# EAGLE board board (EAGLE 9.5.0)
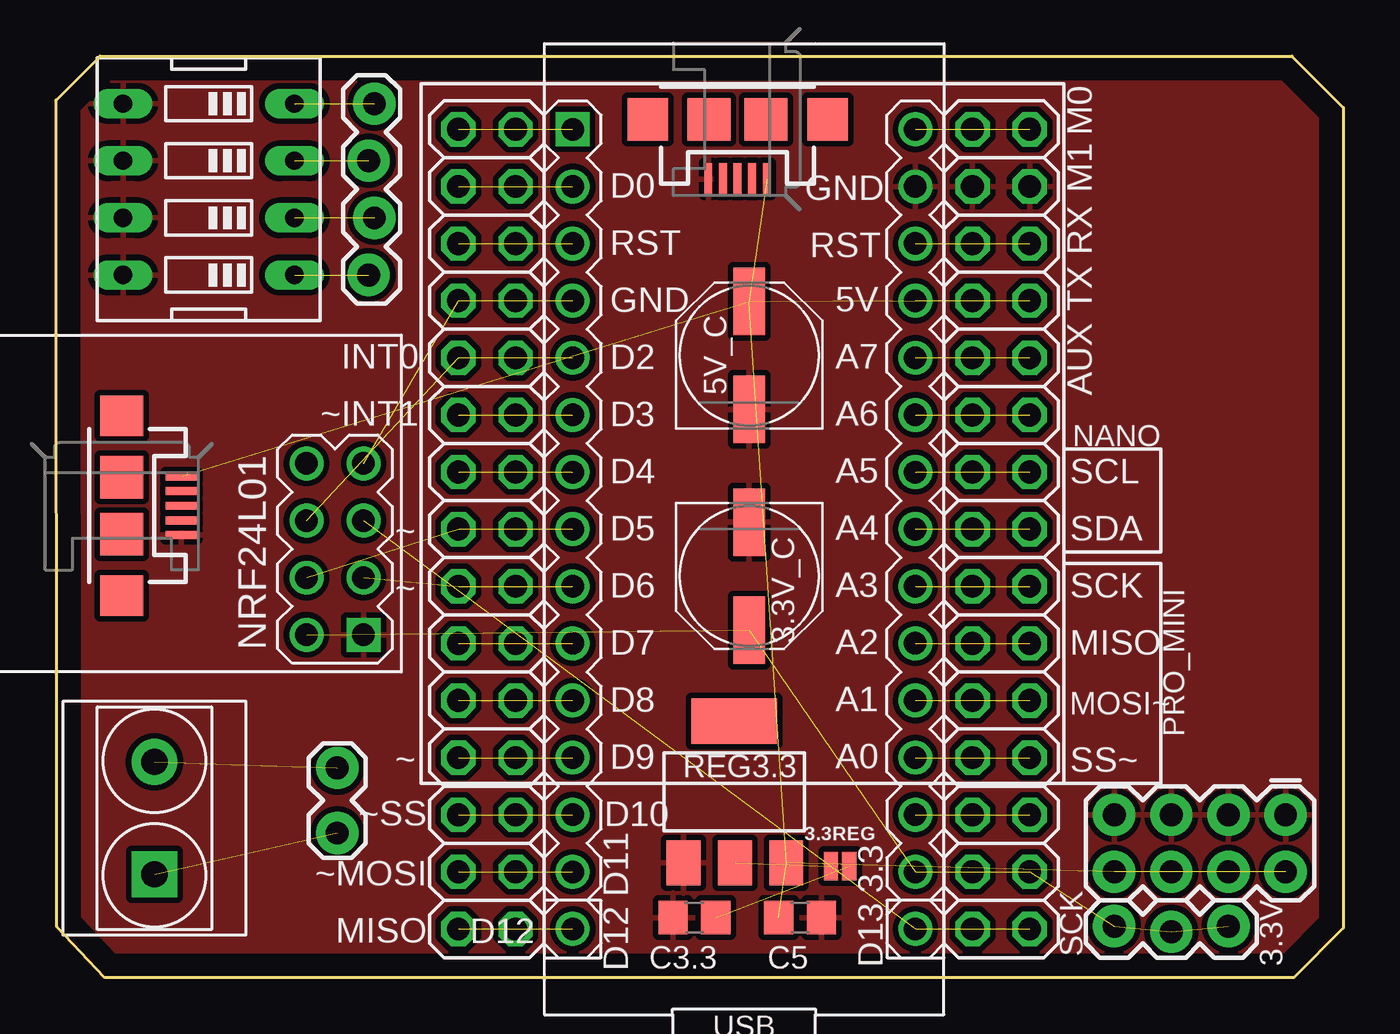
[diagram p0: board, top side]
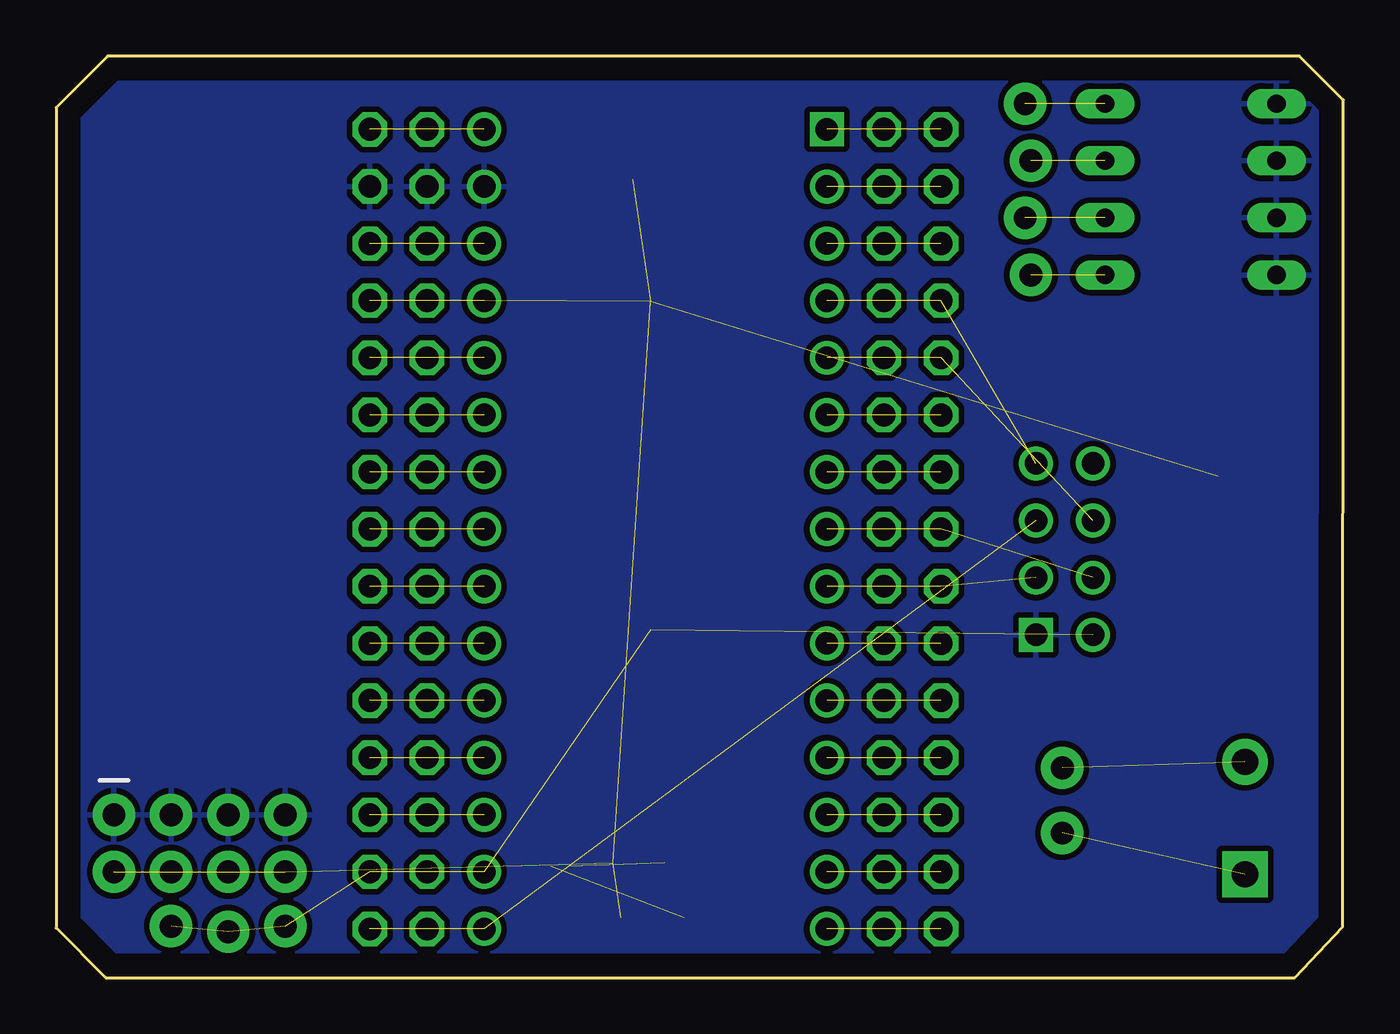
[diagram p1: board, bottom side, seen from below]

Size 57.23 x 40.97 mm. Coordinates in mm from the lower left corner, seen from the top.
Outline: 1.96,40.97 54.94,40.97 57.23,38.68 57.23,2.21 55.02,0 2.16,0 0.03,2.26 0,39.01 1.96,40.97
Copper layers (1*16): Top 0.035mm / dielectric 1.5mm / Bottom 0.035mm
Design rules "default": minimum track width 6mil, minimum drill 0.35mm, track to track 6mil, track to pad 6mil, pad to pad 6mil, via to via 6mil, smd to smd 6mil, copper to edge 40mil, drill to drill 6mil, minimum pad ring 10mil, minimum via ring 8mil, stop-mask expansion 4mil, vias tented up to drill 0mil, thermal gap 10mil
Net classes: 0 default: width 0.203 mm, drill 0.127 mm, clearance 0.152 mm; 1 power: width 0.762 mm, clearance 0.254 mm; 2 terminal: width 2.159 mm, clearance 0.305 mm

## Footprints (pad centres in the part's own frame; a part is rotated, then mirrored left to right if it is on the bottom)
SMT-JUMPER_2_NO_NO-SILK = smd 0.635 x 1.27: 1 -0.406,0; 2 0.406,0
1X03_LOCK = drill 1.016 pad 1.88: 1 0,0.127; 2 2.54,-0.127; 3 5.08,0.127
PANASONIC_D = smd 3 x 1.4: + 2.4,0; - -2.4,0
2X4 = drill 1.016 pad 1.88: 1 -3.81,-1.27; 2 -3.81,1.27; 3 -1.27,-1.27; 4 -1.27,1.27; 5 1.27,-1.27; 6 1.27,1.27; 7 3.81,-1.27; 8 3.81,1.27
C0805 = smd 1.3 x 1.5: 1 -0.95,0; 2 0.95,0
1X04_LOCK = drill 1.016 pad 1.88: 1 0,0.127; 2 2.54,-0.127; 3 5.08,0.127; 4 7.62,-0.127
USB-MICROB = smd 1.4 x 0.35: D+ -2.65,0; D- -2.65,-0.65; GND -2.65,1.3; ID -2.65,0.65; VBUS -2.65,-1.3 | smd 1.9 x 1.8: MT1 0,-4; MT2 0,4 | smd 1.9 x 1.9: P$1 0,-1.27; P$2 0,1.27
ARDUINO-NANO-3.0 = drill 1 square: J1.1 17.78,7.62 | drill 1: J1.2 15.24,7.62; J1.3 12.7,7.62; J1.4 10.16,7.62; J1.5 7.62,7.62; J1.6 5.08,7.62; J1.7 2.54,7.62; J1.8 0,7.62; J1.9 -2.54,7.62; J1.10 -5.08,7.62; J1.11 -7.62,7.62; J1.12 -10.16,7.62; J1.13 -12.7,7.62; J1.14 -15.24,7.62; J1.15 -17.78,7.62; J2.1 17.78,-7.62; J2.2 15.24,-7.62; J2.3 12.7,-7.62; J2.4 10.16,-7.62; J2.5 7.62,-7.62; J2.6 5.08,-7.62; J2.7 2.54,-7.62; J2.8 0,-7.62; J2.9 -2.54,-7.62; J2.10 -5.08,-7.62; J2.11 -7.62,-7.62; J2.12 -10.16,-7.62; J2.13 -12.7,-7.62; J2.14 -15.24,-7.62; J2.15 -17.78,-7.62
WIRELESS-NRF24L01 = drill 1 square: 1 -12.7,6.35 | drill 1: 2 -10.16,6.35; 3 -12.7,3.81; 4 -10.16,3.81; 5 -12.7,1.27; 6 -10.16,1.27; 7 -12.7,-1.27; 8 -10.16,-1.27
2X15 = drill 1.016 octagon: 1 -17.78,-1.27; 2 -17.78,1.27; 3 -15.24,-1.27; 4 -15.24,1.27; 5 -12.7,-1.27; 6 -12.7,1.27; 7 -10.16,-1.27; 8 -10.16,1.27; 9 -7.62,-1.27; 10 -7.62,1.27; 11 -5.08,-1.27; 12 -5.08,1.27; 13 -2.54,-1.27; 14 -2.54,1.27; 15 0,-1.27; 16 0,1.27; 17 2.54,-1.27; 18 2.54,1.27; 19 5.08,-1.27; 20 5.08,1.27; 21 7.62,-1.27; 22 7.62,1.27; 23 10.16,-1.27; 24 10.16,1.27; 25 12.7,-1.27; 26 12.7,1.27; 27 15.24,-1.27; 28 15.24,1.27; 29 17.78,-1.27; 30 17.78,1.27
1X02_LOCK = drill 1.016 pad 1.88: 1 -0.178,0; 2 2.718,0
SOT223 = smd 1.499 x 2.007: 1 -2.261,-3.15; 2 0.025,-3.15; 3 2.311,-3.15 | smd 3.81 x 2.007: 4 0,3.15
EDG-04 = drill 0.813 long: 1 -3.81,-3.81; 2 -1.27,-3.81; 3 1.27,-3.81; 4 3.81,-3.81; 5 3.81,3.81; 6 1.27,3.81; 7 -1.27,3.81; 8 -3.81,3.81
H2-5.0-10.5X8.0MM = drill 1.168 pad 2.032 square: 1 0,2.5 | drill 1.168 pad 2.032: 2 0,-2.5

## Placement (x,y rotation side)
3.3REG  [SMT-JUMPER_2_NO_NO-SILK]  34.85,4.95 0 top
3.3V  [1X03_LOCK]  47.04,2.16 0 top
3.3V_C  [PANASONIC_D]  30.81,17.86 270 top
5.GND  [2X4]  50.85,5.97 180 top
5V_C  [PANASONIC_D]  30.81,27.66 90 top
C3.3  100nF  [C0805]  28.37,2.67 0 top
C5  100nF  [C0805]  33.07,2.67 0 top
J4  [1X04_LOCK]  14.02,38.86 270 top
MICRO_1  [USB-MICROB]  2.92,20.98 180 top
MICRO_2  [USB-MICROB]  30.29,38.16 90 top
NANO  ARDUINO-NANO-3.0  [ARDUINO-NANO-3.0]  30.58,19.94 90 top
NRF24L01  [WIRELESS-NRF24L01]  0.97,21.59 180 top
PH1  [2X15]  42.01,19.94 90 top
PH2  [2X15]  19.15,19.94 90 top
PIN1  [1X02_LOCK]  12.5,9.14 270 top
REG3.3  REG1117  [SOT223]  30.15,8.25 0 top
SW1  [EDG-04]  6.78,35.05 90 top
T1_5MM  5mm  [H2-5.0-10.5X8.0MM]  4.37,7.09 180 top

## Library data of the parts
3.3REG = SparkFun-Jumpers
3.3V 5.GND PIN1 = SparkFun-Connectors
3.3V_C 5V_C = rcl
C3.3 C5 = rcl; SPICEPREFIX: C
J4 = SparkFun-Connectors; PROD_ID: CONN-09696
MICRO_1 MICRO_2 = SparkFun-Connectors; PROD_ID: CONN-09505; SF_ID: PRT-08533
NANO NRF24L01 = diy-modules
PH1 PH2 = pinhead
REG3.3 = burr-brown; MPN: REG1117; OC_FARNELL: 1097566; OC_NEWARK: 14P6981
SW1 = special
T1_5MM = Seeed-Connector

## Nets
3.3V [power]: 3.3V.1 3.3V.2 3.3V.3 3.3V_C.+ NANO.J2.14 NRF24L01.2 PH1.3 PH1.4
5V [power]: 5.GND.2 5.GND.4 5.GND.6 5.GND.8 5V_C.+ C5.1 MICRO_1.VBUS MICRO_2.VBUS NANO.J2.4 PH1.23 PH1.24 REG3.3.3
A5: NANO.J2.7 PH1.17 PH1.18
A6: NANO.J2.6 PH1.19 PH1.20
A7: NANO.J2.5 PH1.21 PH1.22
CE_NRF: NANO.J1.9 NRF24L01.3 PH2.13 PH2.14
CSN_NRF: NANO.J1.8 NRF24L01.4 PH2.15 PH2.16
GND [power]: 3.3V_C.- 5.GND.1 5.GND.3 5.GND.5 5.GND.7 5V_C.- C3.3.1 C5.2 MICRO_1.GND MICRO_2.GND NANO.J2.2 NRF24L01.1 PH1.27 PH1.28 REG3.3.1 SW1.5 SW1.6 SW1.7 SW1.8
MISO_NRF: NANO.J1.4 NRF24L01.7 PH2.23 PH2.24
MOSI_NRF: NANO.J1.5 NRF24L01.6 PH2.21 PH2.22
N$1 [power]: 3.3REG.2 C3.3.2
N$2 [power]: 3.3REG.1 REG3.3.2
N$3: NANO.J2.13 PH1.5 PH1.6
N$4: NANO.J2.12 PH1.7 PH1.8
N$5: NANO.J2.11 PH1.9 PH1.10
N$6: NANO.J2.10 PH1.11 PH1.12
N$7: NANO.J2.9 PH1.13 PH1.14
N$8: NANO.J2.8 PH1.15 PH1.16
N$16: NANO.J1.15 PH2.1 PH2.2
N$17: NANO.J1.14 PH2.3 PH2.4
N$18: NANO.J1.13 PH2.5 PH2.6
N$19: NANO.J1.12 PH2.7 PH2.8
N$20: NANO.J1.11 PH2.9 PH2.10
N$21: NANO.J1.10 PH2.11 PH2.12
N$23 [terminal]: PIN1.2 T1_5MM.1
N$24: NANO.J1.7 PH2.17 PH2.18
N$25: NANO.J1.6 PH2.19 PH2.20
N$26 [terminal]: PIN1.1 T1_5MM.2
N$28: NANO.J1.3 PH2.25 PH2.26
N$29: NANO.J1.2 PH2.27 PH2.28
N$30: NANO.J1.1 PH2.29 PH2.30
N$39 [power]: J4.1 SW1.4
N$40 [power]: J4.2 SW1.3
N$41 [power]: J4.3 SW1.2
N$42 [power]: J4.4 SW1.1
RST: NANO.J2.3 PH1.25 PH1.26
SCK_NRF: NANO.J2.15 NRF24L01.5 PH1.1 PH1.2
VIN [power]: NANO.J2.1 PH1.29 PH1.30

## Tracks (layer width: path | path; a pad name or v marks a point on that pad's centre or on a via)
3.3V  (7 unrouted)
5V  (11 unrouted)
A5  (2 unrouted)
A6  (2 unrouted)
A7  (2 unrouted)
CE_NRF  (3 unrouted)
CSN_NRF  (3 unrouted)
GND
  pour Top: 0.18,42.9 0.18,-0.13 59.23,-0.13 59.23,42.9
  pour Bottom: -2.49,-2.67 59.99,-2.67 59.99,43.05 -2.49,43.05
MISO_NRF  (3 unrouted)
MOSI_NRF  (3 unrouted)
N$1  (1 unrouted)
N$2  (1 unrouted)
N$3  (2 unrouted)
N$4  (2 unrouted)
N$5  (2 unrouted)
N$6  (2 unrouted)
N$7  (2 unrouted)
N$8  (2 unrouted)
N$16  (2 unrouted)
N$17  (2 unrouted)
N$18  (2 unrouted)
N$19  (2 unrouted)
N$20  (2 unrouted)
N$21  (2 unrouted)
N$23  (1 unrouted)
N$24  (2 unrouted)
N$25  (2 unrouted)
N$26  (1 unrouted)
N$28  (2 unrouted)
N$29  (2 unrouted)
N$30  (2 unrouted)
N$39  (1 unrouted)
N$40  (1 unrouted)
N$41  (1 unrouted)
N$42  (1 unrouted)
RST  (2 unrouted)
SCK_NRF  (3 unrouted)
VIN  (2 unrouted)

## Text on the board
tPlace: M0 | M1 | GND | D0 | RX | RST | RST | TX | 5V | GND | AUX | INT0 | A7 | D2 | ~INT1 | A6 | D3 | NANO | A5 | D4 | SCL | ~ | A4 | D5 | SDA | ~ | A3 | D6 | SCK | A2 | D7 | MISO | A1 | D8 | MOSI~ | A0 | PRO_MINI | ~ | D9 | SS~ | ~SS | D10 | ~MOSI | D11 | 3.3 | MISO | D12 | D13 | SCK | D12
silktop: TOP
silkbottom: BOT